# Altium PCB OLED_V3.1.PcbDoc
Units mil, origin at the board's own origin, x right, y up, seen from the top; angles counter-clockwise.
Board outline 1350 x 1025 mil, 2 copper layers (Top Layer, Bottom Layer); 17 components, 20 nets, 81 pads, 49 vias.
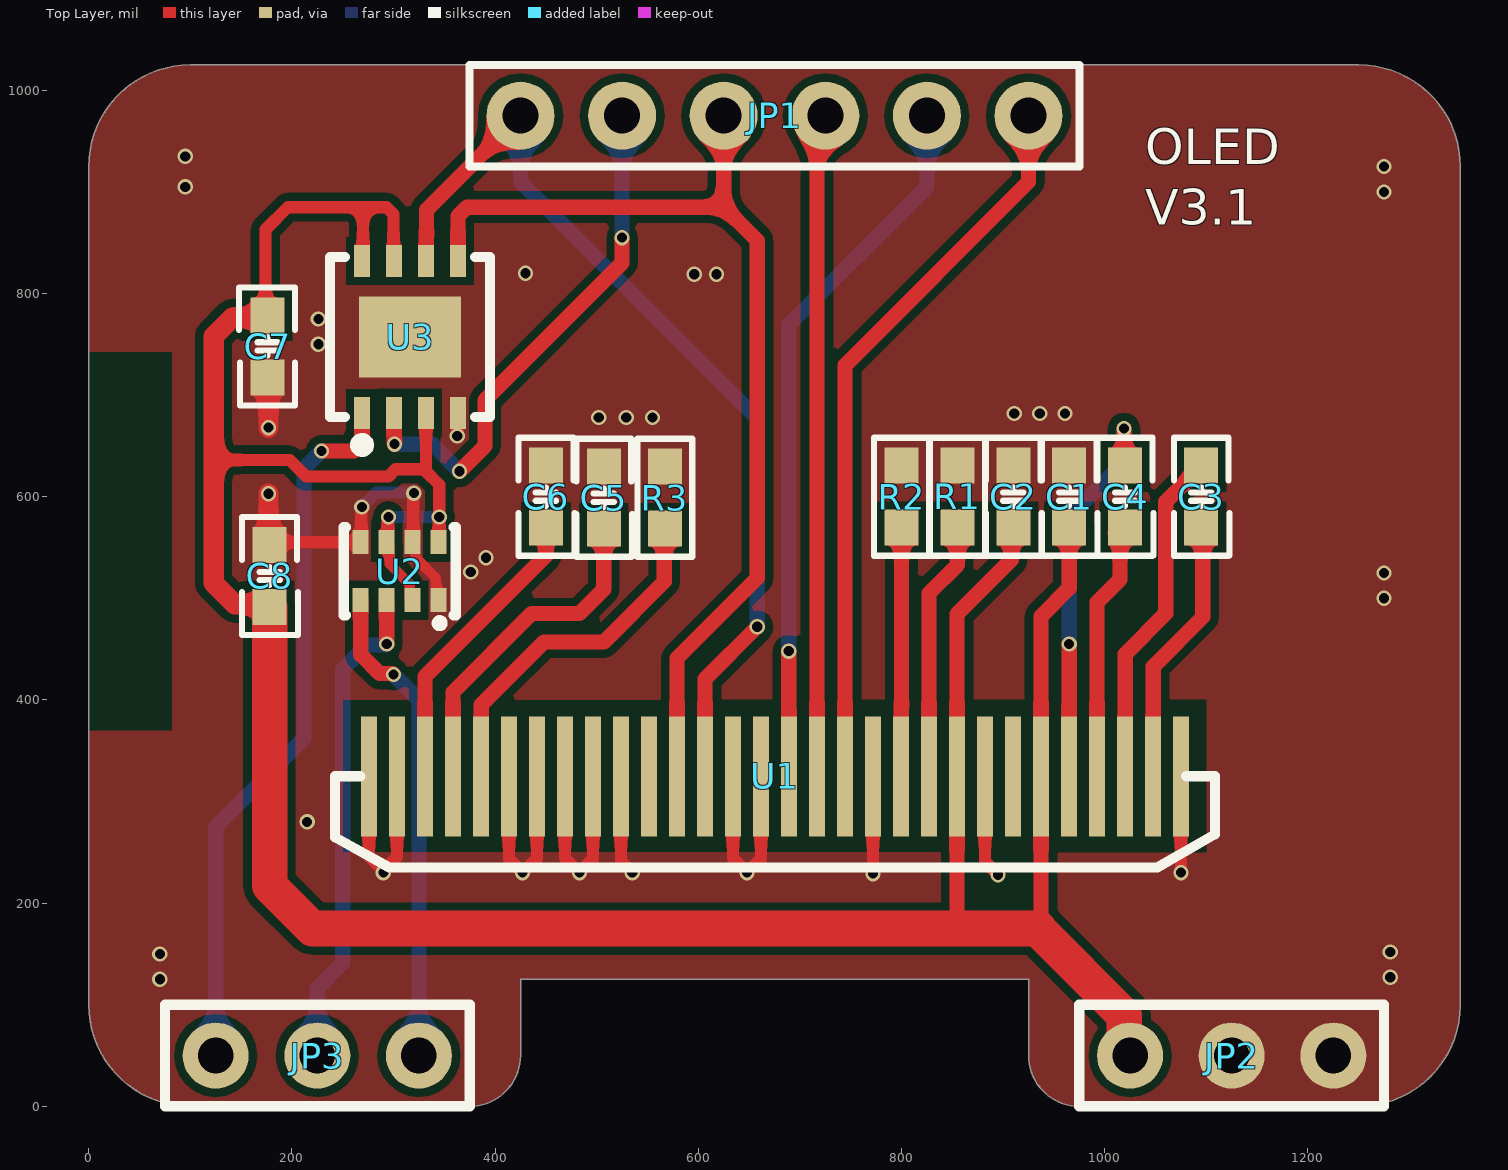
[diagram p0: Top Layer view]
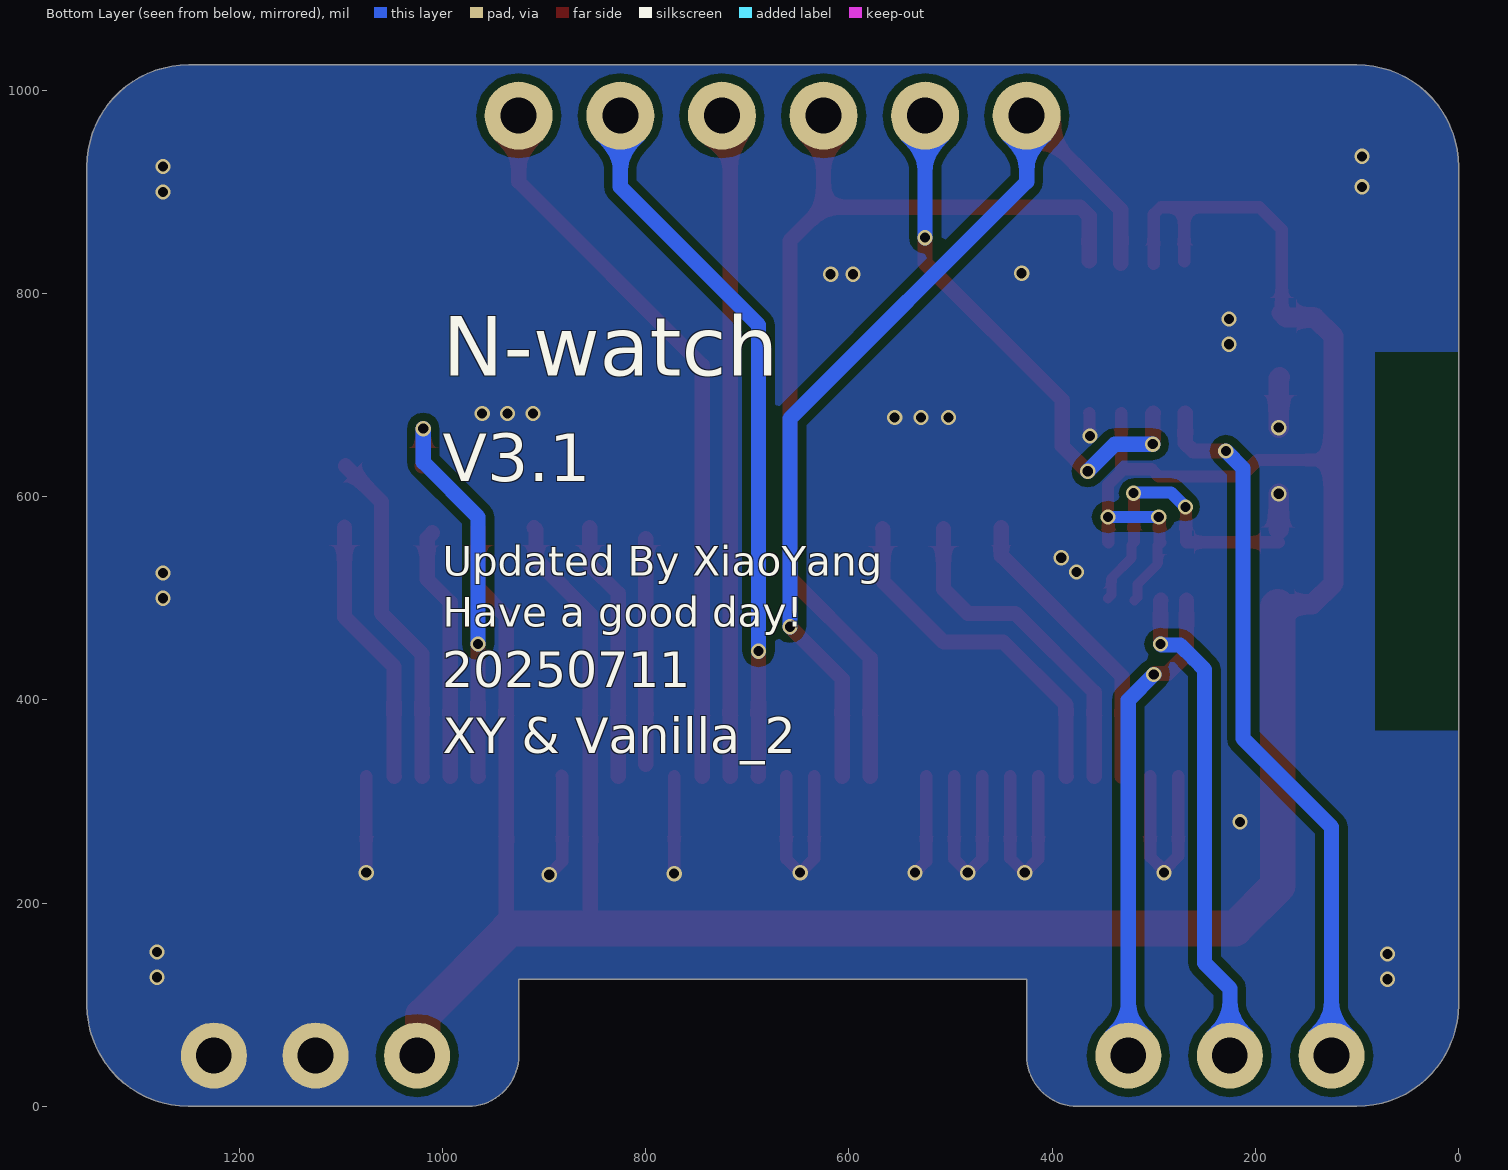
[diagram p1: Bottom Layer view, seen from below]

## Layer stack, top to bottom
Top Solder: solder mask 0.4, Solder Resist, Dk 3.5
Top Layer: signal copper 1.4
Dielectric 1: dielectric 12.6, FR-4, Dk 4.8
Bottom Layer: signal copper 1.4
Bottom Solder: solder mask 0.4, Solder Resist, Dk 3.5

## Board outline
100,0 cw(c100,100) 0,100 0,925 cw(c100,925) 100,1025 1250,1025 cw(c1250,925) 1350,925 1350,100 1350,99.72 cw(c1250,100) 1250,0 975,0 cw(c975,50) 925,50 925,125 425,125 425,50 cw(c375,50) 375,0

## Design rules (kind name [scope] priority, off if disabled: settings)
Clearance [All] p1: gap=8 ignorepadtopadclearanceinfootprint=TRUE
ComponentClearance [All] p1: gap=0 collisioncheckmode=3 verticalgap=100000 showdistances=FALSE
ComponentOrientations [All] p1: allowedrotations=1
NetsToIgnore [All] p1:
PermittedLayers [All] p1: toplayerpermitted=TRUE bottomlayerpermitted=FALSE
PolygonConnect [All] p1: connectstyle=Direct reliefconductorwidth=10 reliefentries=4 polygonreliefangle="90 Angle" airgapwidth=10
RoutingVias [All] p1: holewidth=24 width=12 viastyle="Through Hole" minholewidth=10 minwidth=10 maxholewidth=100 maxwidth=100
SolderMaskExpansion [All] p1: expansion=4 istentingtop=FALSE
Width [All] p1: maxlimit=100 minlimit=10 preferedwidth=12 minimp=50.000000 maximp=50.000000 favimp=50.000000
29 further rules are at their usual default settings.

## Components (designator, comment, footprint, x,y, rotation, side; value= is the part's Value field where it differs from the comment)
C1 "105" C0603_M 965,600 r270 top
C2 "105" C0603_M 910,600 r270 top
C3 "105" C0603_M 1095,600 r270 top
C4 "105" C0603_M 1020,600 r270 top
C5 "4.7uf" C0603_M 507,599 r270 top
C6 "2.2uf" C0603_M 450,600 r270 top
C7 "104" C0603_M 176,748 r90 top
C8 "104" C0603_M 178,522 r270 top
JP1 "HDR-1X6" HDR-1X6 425,975 r0 top locked
JP2 "HDR-1X3" OLED_3PIN 975,0 r0 top locked
JP3 "HDR-1X3" OLED_3PIN 75,0 r0 top locked
R1 "4.7K" R0603_M 855,600 r270 top
R2 "4.7K" R0603_M 800,600 r270 top
R3 "560K" R0603_M 567,599 r270 top
U1 "0.96-OLED-30Pin_JX" SSD1306-30PIN_JX 1075,325 r180 top locked
U2 "BMP280" LGA-8_L2.5-W2.0-P0.65_AMP6127 345,475 r270 top
U3 "W25Q64JVXGIQ" XSON-8_L4.0-W4.0-P0.80-TL-EP 270,650 r90 top

## Footprints (in the part's own frame and the unit in brackets; to place one, negate y for a bottom-side part, rotate by r counter-clockwise, add the part's x,y. Pads: shape width x height; smd on the part's side, far side on the other; paste and mask are expansions set on the pad)
C0603_M [mm] "贴片MLCC电容"
  rect 0.9x0.85 smd: 1(-0.775,0) 2(0.775,0)
  silkscreen extent -1.47,-0.69 1.48,0.71, body extent -0.8,-0.4 0.8,0.4, height 0.8
HDR-1X6 [mm] "排针，6脚"
  round 1.7 hole 0.9: 1(0,0) 2(2.54,0) 3(5.08,0) 4(7.62,0) 5(10.16,0) 6(12.7,0)
  silkscreen extent -1.27,-1.27 13.97,1.27, body extent -1.27,-1.27 13.97,1.27, height 8.5
LGA-8_L2.5-W2.0-P0.65_AMP6127 [mm]
  rect 0.6x0.4 smd paste+0 mask+0.051: 1(-0.588,-0.013) 2(-0.588,-0.663) 3(-0.588,-1.313) 4(-0.588,-1.963) 5(-2.038,-1.963) 6(-2.038,-1.313) 7(-2.038,-0.663) 8(-2.038,-0.013)
  silkscreen extent -2.41,-2.39 0.09,0.41
OLED_3PIN [mil]
  round 65 hole 35: 1(50,50) 2(150,50) 3(250,50)
  silkscreen extent 0,0 300,100
R0603_M [mm] "1/10W贴片电阻"
  rect 0.9x0.85 smd: 1(-0.775,0) 2(0.775,0)
  silkscreen extent -1.48,-0.69 1.48,0.69, body extent -0.8,-0.4 0.8,0.4, height 0.4
SSD1306-30PIN_JX [mm]
  rect 0.4x3 smd: 1(-0.002,0.004) 2(0.699,0.004) 3(1.398,0.004) 4(2.099,0.004) 5(2.798,0.004) 6(3.498,0.004) 7(4.199,0.004) 8(4.898,0.004) 9(5.598,0.004) 10(6.299,0.004) 11(6.998,0.004) 12(7.698,0.004) 13(8.399,0.004) 14(9.098,0.004) 15(9.798,0.004) 16(10.499,0.004) 17(11.198,0.004) 18(11.898,0.004) 19(12.599,0.004) 20(13.298,0.004) 21(13.998,0.004) 22(14.698,0.004) 23(15.398,0.004) 24(16.098,0.004) 25(16.799,0.004) 26(17.498,0.004) 27(18.198,0.004) 28(18.899,0.004) 29(19.598,0.004) 30(20.298,0.004)
  silkscreen extent -0.85,0 21.15,2.29
XSON-8_L4.0-W4.0-P0.80-TL-EP [mm]
  rect 0.8x0.4 smd paste+0 mask+0.05: 1(0.823,0.025) 2(0.823,-0.775) 3(0.823,-1.575) 4(0.823,-2.375) 5(4.623,-2.375) 6(4.623,-1.575) 7(4.623,-0.775) 8(4.623,0.025)
  rect 2.032x2.54 smd paste+0 mask+0.05: 9(2.723,-1.175)
  silkscreen extent -0.13,-3.17 4.72,0.82

## Part data
C1 C2 C3 C4 C5 C6 C7 C8: library part C, "贴片电容/MLCC电容", BOM名称=无极性贴片电容, 当前库版本V2022.11.14 @淘宝卖家:黄晶宝石=最新版本发布https://shop463601444.taobao.com
JP1: library part "Header 6", "6P接插件", BOM名称=6P接插件, 学习资源=https://lmdzstyle.taobao.com/, 版权归属=黎明电子style
JP2 JP3: library part "Header 3", "3P接插件", BOM名称=3P接插件, 学习资源=https://lmdzstyle.taobao.com/, 版权归属=黎明电子style
R1 R2 R3: library part R, "贴片电阻", BOM名称=贴片电阻, 联系下单店铺卖家 免费帮你查找封装="联系下单店铺卖家 免费技术支持"
U1: BOM_Supplier=LCSC, spicePre=U

## Via types
v1: diameter 15, hole 10, Top Layer to Bottom Layer, tented both sides, 49 vias

## Nets (pads, with @x,y where several pads share a name; then routed paths per layer and width w, separated by ;. In a path a pad name is that pad's centre, name@x,y a point inside that pad or via, vN(x,y) a via of type N, cw(c..) or ccw(c..) an arc to the next point about the centre after c; other vN are vias at no path point)
+3V3: C1.2 C2.2 C7.2 C8.2 JP2.1 U1.6 U1.9 U2.2 U2.6 U2.8 U3.3 U3.7 U3.8 | length 3223.4
  Top Layer w10: U2.6 296.2,552.36 296.2,533.82 316.04,513.98 316.04,501.02 U2.2
  Top Layer w12: 123,636.17 197.83,636.17 214,620 295,620 302,627 329.73,627 331.99,624.74 345,611.73 v1(345,580) 344.75,579.75 344.75,555.48 U2.8 ; C7.2@174,780.86 174,863 196,885 270,885 ; C7.2 C7.2@176,780.86 ; U3.8@270,831.53 270,885 ; U2.6 294.43,556.34 294.43,579.43 v1(295,580) ; U3.7@300,829.14 300,877.97 292.97,885 270,885 ; 332.01,624.76 U3.3
  Top Layer w15: 855,175 855,185 854.59,185.41 U1.9 854.59,484.59 908.06,538.06 908.06,567.55 C2.2 ; 935,175 937.27,177.27 U1.6 937.27,482.27 965,510 C1.2
  Top Layer w20: C7.2@174,780.86 169.46,776.32 141.32,776.32 123,758 123,636.17 123,515 143.82,494.18 175.31,494.18 C8.2
  Top Layer w35: C8.2 178,217 220,175 855,175 935,175 935,173.67 1019.26,89.41 1019.26,55.74 JP2.1@1022.13,52.87
  Top Layer w50: JP2.1@1022.13,52.87 JP2.1
  Bottom Layer w12: v1(295,580) v1@344.19,580
BS0: R1.2 U1.10 | length 256.2
  Top Layer w15: U1.10 827.02,505.02 855,533 R1.2
BS1: R2.2 U1.11 | length 222.1
  Top Layer w15: U1.11@800,336.52 R2.2@800,558.66
GND: C1.1 C2.1 C5.1 C6.1 C7.1 C8.1 JP2.2 JP2.3 R1.1 R2.1 R3.1 U1.1 U1.8 U1.12 U1.16 U1.17 U1.21 U1.22 U1.23 U1.24 U1.25 U1.29 U1.30 U2.1 U2.5 U2.7 U3.4 U3.9 | length 1599.3
  Top Layer w10: U2.7 321.79,552.36 321.79,539.88 341.63,520.04 341.63,503.37 U2.1@345,500
  Top Layer w12: C8.1@177,555.23 U2.5 ; U2.5@268.27,555.78 v1@268.27,589.46 ; U1.30 275.85,246.31 v1@290,232.16 ; v1(290,230) v1@290,232.16 ; U1.29 303.41,245.57 v1@290,232.16 ; U2.7@319.46,555.78 319.46,602.96 v1(320,603.5) ; v1(362.8,659.73) 363.15,660.08 363.15,682.05 U3.4 ; U1.25 413.64,243.36 v1(427,230) 441.13,244.13 ccw(c440.93,244.33) 441.21,244.33 U1.24 ; U1.23 468.77,244.23 v1(483,230) 496.32,243.32 U1.22 ; U1.21 523.88,241.12 v1(535,230) ; U1.17 634.12,243.88 v1(648,230) 661.67,243.67 U1.16 ; U1.12 771.92,229.08 v1(772,229) ; U1.8@882.96,325.66 U1.8 882.15,240.85 v1(895,228) ; v1(1075,230) U1.1
  Top Layer w20: C7.1 177,716.48 v1(177,668) ; C8.1@177,568 v1(177,603)
  Bottom Layer w12: v1(268.82,590) 282.89,604.07 319.43,604.07 v1(320,603.5)
  other v1: 70,125 1281,127 70,150 1281,152 215,280 1275,500 1275,525 376,526 391,540 502,678 529,678 555,678 911,682 936,682 961,682 226,750 226,775 596,819 618,819 430,820 1275,900 95,905 1275,925 95,935
I_REF: R3.2 U1.26 | length 353.1
  Top Layer w15: U1.26 386.46,325.22 386.46,395.35 448.12,457 507,457 566.5,516.5 566.5,567.99 R3.2
NetC3_1: C3.1 U1.3 | length 337.2
  Top Layer w15: U1.3 1020.32,325.22 1020.32,445.32 1060,485 1060,595 1085.3,620.3 1085.77,620.3 1095.52,630.05 C3.1@1095.52,630.52
NetC3_2: C3.2 U1.2 | length 265.4
  Top Layer w15: U1.2 1047.87,325.22 1047.87,432.87 1096.49,481.49 C3.2@1096.49,570
NetC4_1: C4.1 U1.5 | length 401.5
  Top Layer w15: U1.5 965,325.02 v1(965,455) ; v1(1019,667) 1019,631.52 C4.1
  Bottom Layer w15: v1(965,455) 965,580 1019,634 v1(1019,667)
NetC4_2: C4.2 U1.4 | length 251.1
  Top Layer w15: U1.4 992.38,496.02 1015,518.64 1015,559.49 C4.2@1010,564.49
NetC5_2: C5.2 U1.27 | length 332.7
  Top Layer w15: U1.27 358.53,407.53 436,485 483,485 507,509 C5.2
NetC6_2: C6.2 U1.28 | length 293.9
  Top Layer w15: U1.28 330.96,422.96 450,542 C6.2
OLED_CS#: JP1.6 U1.13 | length 725
  Top Layer w15: U1.13 744.35,729.35 925,910 JP1.6
OLED_D0: JP1.1 U1.18 U3.6 | length 951.8
  Top Layer w15: U3.6@332.38,829.57 332.38,882.38 JP1.1 ; U1.18 606.56,420.56 v1(658,472)
  Bottom Layer w15: JP1.1 425,910 658,677 v1(658,472)
OLED_D1: JP1.3 U1.19 U3.5 | length 1005.9
  Top Layer w15: U3.5 363.5,876.21 372.29,885 625,885 ; U1.19 578.99,440.99 658,520 658,852 625,885 ; JP1.3 625,885
OLED_DC: JP1.5 U1.15 | length 706.6
  Top Layer w15: v1(689,448) 689,325.09 U1.15
  Bottom Layer w15: v1(689,448) 689,769 825,905 JP1.5
OLED_Flash_CS: JP3.1 U3.1 | length 710.8
  Top Layer w15: v1(229,645) 261.03,645 269.02,652.98 U3.1
  Bottom Layer w15: JP3.1 125,275 212,362 212,628 v1(229,645)
OLED_MI: JP1.2 U3.2 | length 522.3
  Top Layer w15: U3.2 300.89,682.03 v1(300.89,651.75) ; v1(365,625) 390,650 390,695 525,830 v1(525,855)
  Bottom Layer w15: v1(300.89,651.75) 338.25,651.75 v1(365,625) ; v1(525,855) JP1.2
OLED_RST: JP1.4 U1.14 | length 653.5
  Top Layer w15: U1.14 716.8,966.8 JP1.4
OLED_SCL: JP3.3 U2.4 | length 479.3
  Top Layer w15: U2.4 267.73,444.53 286.3,425.96 299.04,425.96 v1(300,425)
  Bottom Layer w15: v1(300,425) 325,400 JP3.3
OLED_SDA: JP3.2 U2.3 | length 487.2
  Top Layer w15: U2.3@292.95,498.15 293.28,497.82 v1(293.28,455.05)
  Bottom Layer w15: JP3.2 225,116 250,141 250,430 260.61,440.61 274.09,454.09 292.32,454.09 v1(293.28,455.05)
pads on no net: U1.7 U1.20

## Polygon pours and split planes (outlines as drawn)
GND on Top Layer "Top Layer-No Net" (solid, pour order 0): 100,0 cw(c100,100) 0,100 0,925 cw(c100,925) 100,1025 1250,1025 cw(c1250,925) 1350,925 1350,100 1350,99.72 cw(c1250,100) 1250,0 975,0 cw(c975,50) 925,50 925,125 425,125 425,50 cw(c375,50) 375,0
GND on Bottom Layer "Top Layer-No Net1" (solid, pour order 1): 100,0 cw(c100,100) 0,100 0,925 cw(c100,925) 100,1025 1250,1025 cw(c1250,925) 1350,925 1350,100 1350,99.72 cw(c1250,100) 1250,0 975,0 cw(c975,50) 925,50 925,125 425,125 425,50 cw(c375,50) 375,0

## Other copper
Top Layer:
  pour cut-out: 250,400 1100,400 1100,250 250,250
  pour cut-out: -0.52,742.61 82.33,742.61 82.33,369.61 -1.77,369.61
Bottom Layer:
  pour cut-out: -0.52,742.61 82.33,742.61 82.33,369.61 -1.77,369.61

## Silkscreen, mask and mechanical layers (free items; w line width, h text height)
Top Overlay:
  text "OLED" at 1040,915.67 h60
  text "V3.1" at 1040.06,855.67 h60
Bottom Overlay:
  text "N-watch" at 1000,700 h100
  text "V3.1" at 1000,600 h80
  text "Updated By XiaoYang / Have a good day!" at 1000,462.25 h50
  text "20250711" at 1000.06,400.67 h60
  text "XY & Vanilla_2" at 1000,335.66 h60
Mechanical 1:
  lines w10: 925,124.8 925,50 ccw(c975,50) 975,0 1250,0 ccw(c1250,100) 1350,99.72 ; 925,125 425,125 425,50 cw(c375,50) 375,0 100,0 cw(c100,100) 0,100 0,925 cw(c100,925) 100,1025 1250,1025 cw(c1250,925) 1350,925 1350,100
Mechanical 15:
  lines w5: 25,125 ccw(c125,125) 125,25 350,25 ccw(c350,75) 400,75 400,100 cw(c450,100) 450,150 900,150 cw(c900,100) 950,100 950,75 ccw(c1000,75) 1000,25 1225,25 ccw(c1225,125) 1325,124.72 1325,900 ccw(c1225,900) 1225,1000 125,1000 ccw(c125,900) 25,900 25,125